# Altium PCB PA_v2.PcbDoc (part 1 of 2)
Units mm, origin at the board's own origin, x right, y up, seen from the top; angles counter-clockwise.
Board outline 179 x 79 mm, 2 copper layers (Top Layer, Bottom Layer), stack 1.571 mm thick; 155 components, 92 nets, 518 pads, 817 vias.
Unrouted connection lines stored in the file: 1.
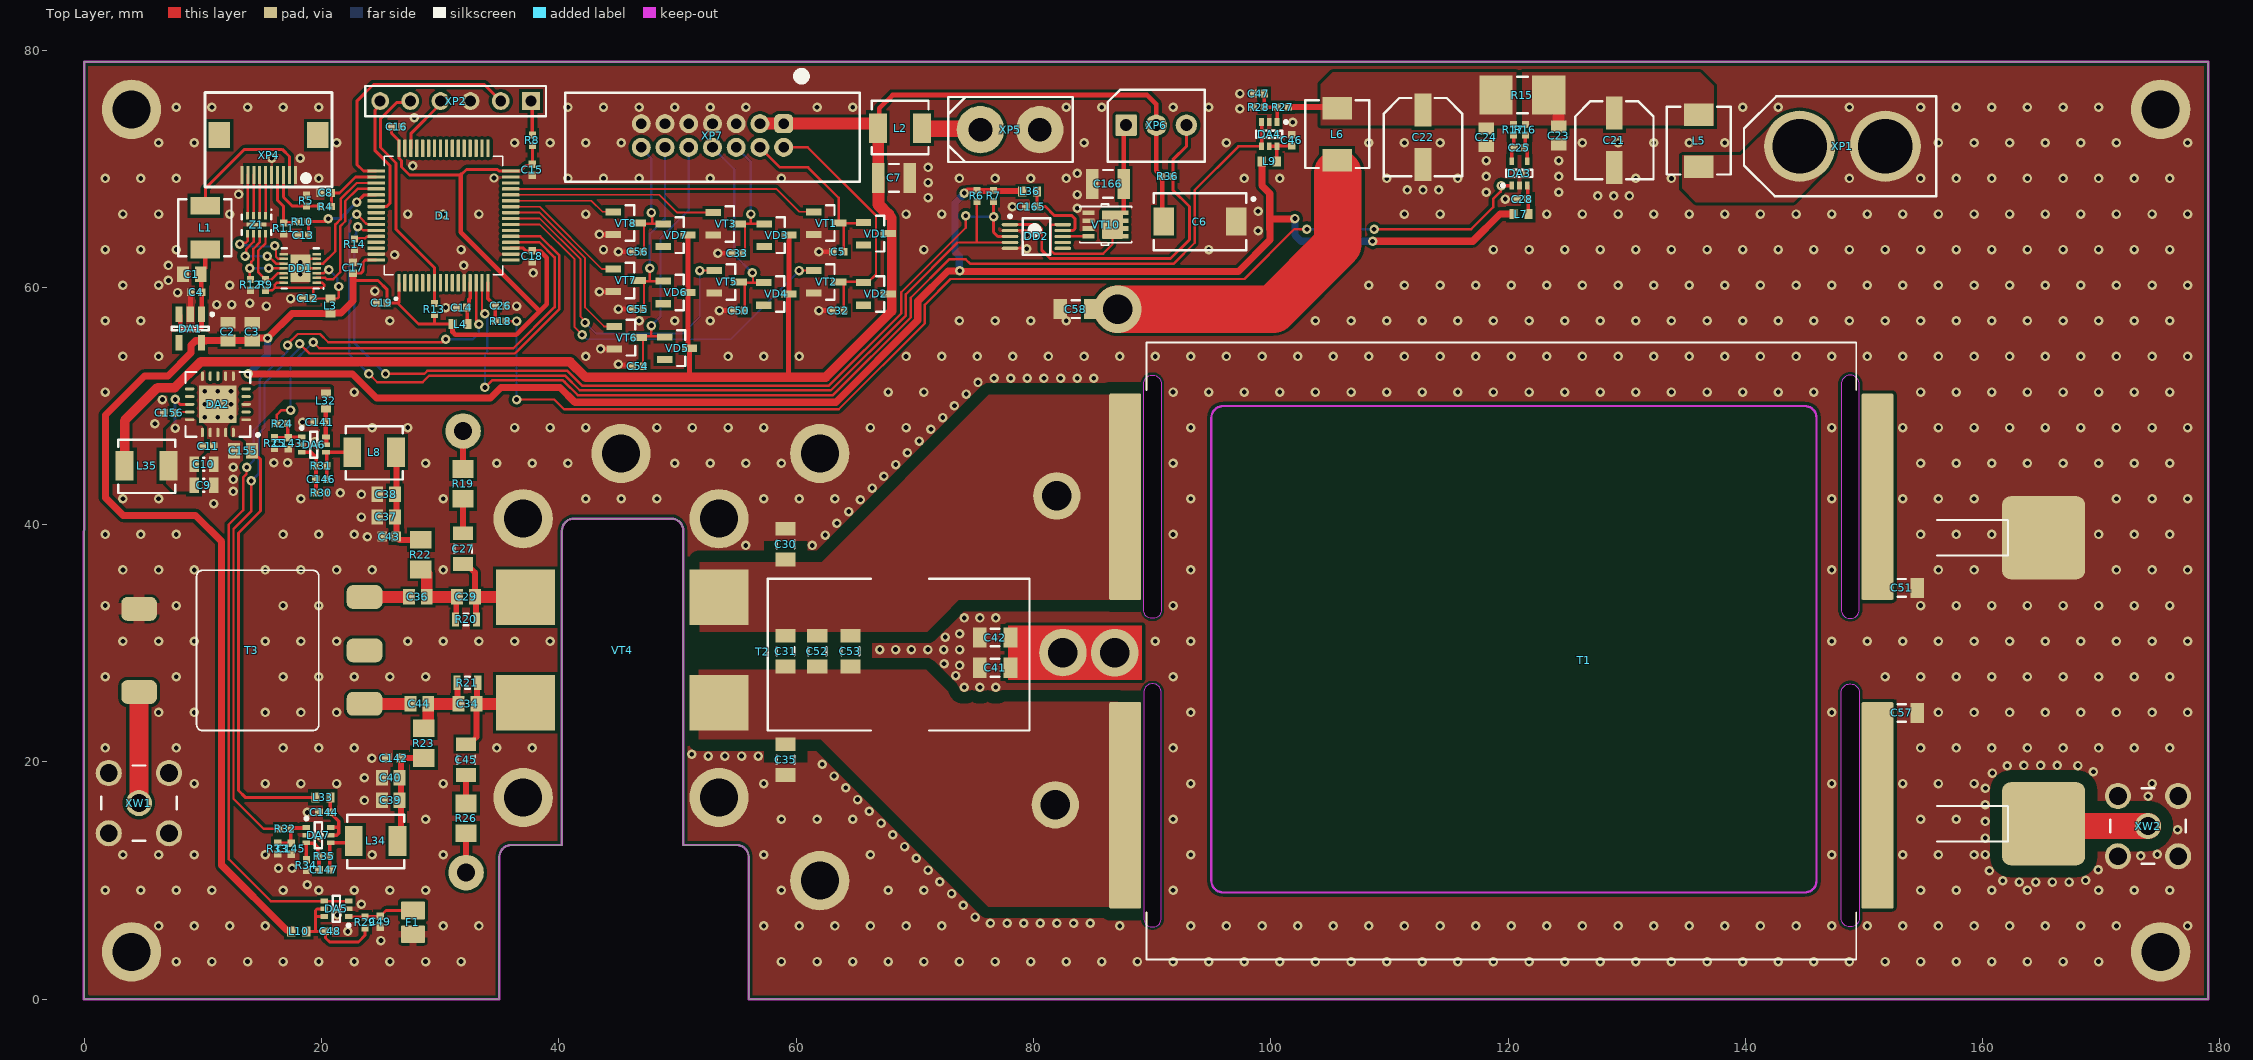
[diagram p0: Top Layer view]
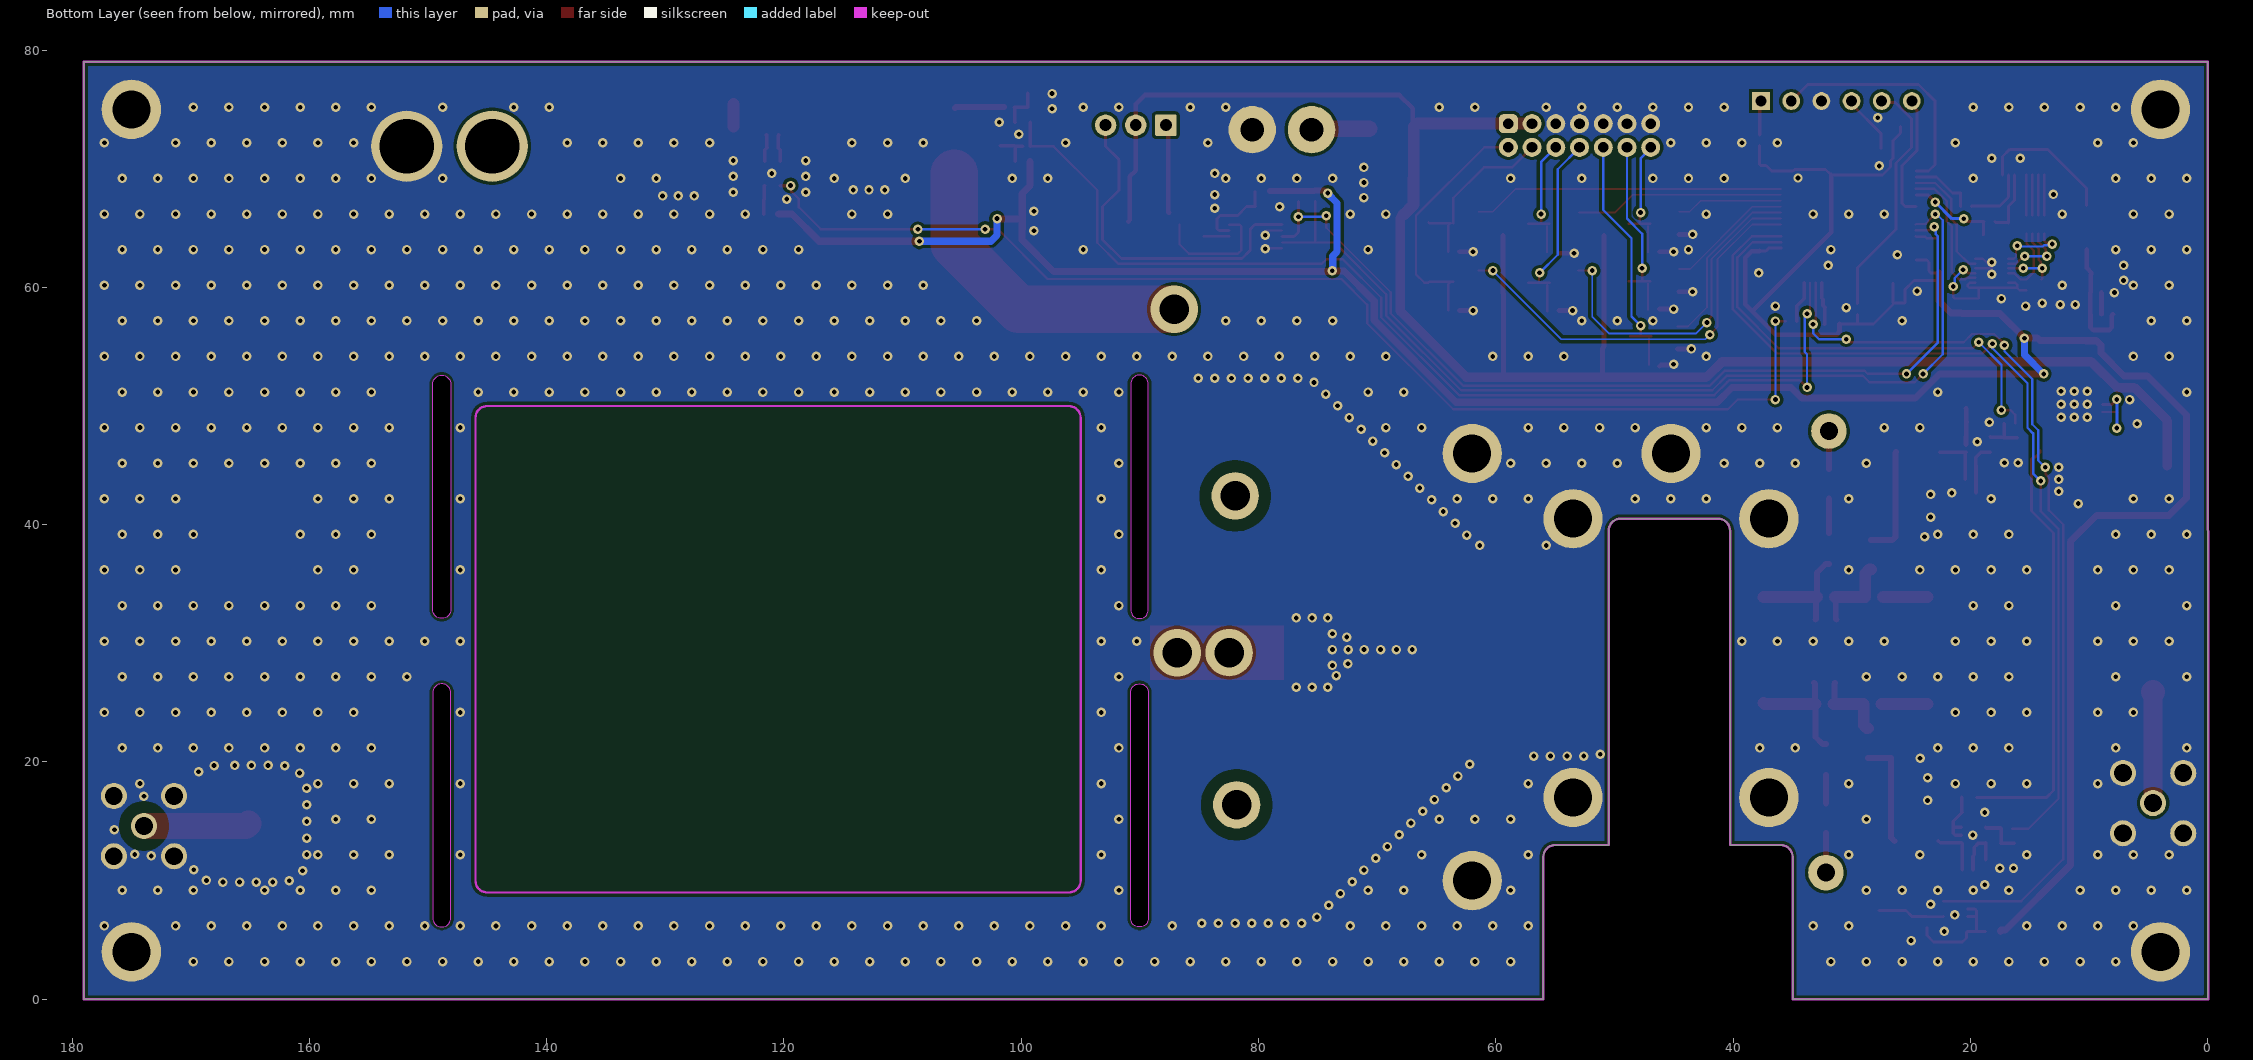
[diagram p1: Bottom Layer view, seen from below]

## Layer stack, top to bottom
Top Solder: solder mask 0.0102, Solder Resist, Dk 3.5
Top Layer: signal copper 0.0356
Dielectric 1: dielectric 1.5, FR-4, Dk 4.8
Bottom Layer: signal copper 0.0356
Bottom Solder: solder mask 0.0102, Solder Resist, Dk 3.5

## Board outline
0,0 35,0 35,12 cw(c36,12) 36,13 40.25,13 40.25,39.5 40.275,39.5 cw(c41.275,39.5) 41.275,40.5 49.53,40.5 49.53,40.513 49.558,40.484 49.5,40.5 cw(c49.5,39.5) 50.5,39.5 50.5,13 55,13 cw(c55,12) 56,12 56,0 179,0 179,79 0,79

## Design rules (kind name [scope] priority, off if disabled: settings)
Clearance Clearance_1 [InNetClass('RF CLR')] p1: gap=0.25 ignorepadtopadclearanceinfootprint=FALSE except(1: Arc-Fill Arc-Poly Arc-Region Track-Fill Track-Poly Track-Region SMDPad-Fill SMDPad-Poly SMDPad-Region THPad-Fill THPad-Poly THPad-Region Via-Fill Via-Poly Via-Region Fill-Fill Fill-Poly Fill-Region Poly-Poly Poly-Region Region-Region)
Clearance [All] p2: gap=0.2 ignorepadtopadclearanceinfootprint=FALSE except(0.25: Arc-Fill Arc-Poly Arc-Region Track-Fill Track-Poly Track-Region SMDPad-Fill SMDPad-Poly SMDPad-Region THPad-Fill THPad-Poly THPad-Region Via-Fill Via-Poly Via-Region Fill-Fill Fill-Poly Fill-Region Poly-Poly Poly-Region Region-Region)
Height [All] p1: minheight=0 maxheight=35 prefheight=12.7
HoleSize [All] p1: absolutevalues=TRUE maxlimit=5 minlimit=0.2 maxpercent=80.000 minpercent=20.000
PolygonConnect [All] p1: connectstyle=Direct reliefconductorwidth=0.254 reliefentries=4 polygonreliefangle="90 Angle" airgapwidth=0.254
RoutingVias [All] p1: holewidth=0.4 width=0.8 viastyle="Through Hole" minholewidth=0.3 minwidth=0.7 maxholewidth=4 maxwidth=5
SolderMaskExpansion [All] p1: expansion=0.102 istentingtop=FALSE
SupplyNets "Schematic Supply Nets_35" [InNet('IN_5V')] p1: voltage=0.000
SupplyNets "Schematic Supply Nets_2" [InNet('VDD_12V')] p2: voltage=0.000
SupplyNets "Schematic Supply Nets_22" [InNet('I2C_SCL')] p3: voltage=0.000
SupplyNets "Schematic Supply Nets_7" [InNet('I2C_SDA')] p4: voltage=0.000
SupplyNets "Schematic Supply Nets_31" [InNet('BAND3_EN')] p5: voltage=0.000
SupplyNets "Schematic Supply Nets_30" [InNet('BAND2_EN')] p6: voltage=0.000
SupplyNets "Schematic Supply Nets_29" [InNet('BAND6_EN')] p7: voltage=0.000
SupplyNets "Schematic Supply Nets_28" [InNet('BAND4_EN')] p8: voltage=0.000
SupplyNets "Schematic Supply Nets_25" [InNet('BAND1_EN')] p9: voltage=0.000
SupplyNets "Schematic Supply Nets_21" [InNet('BAND5_EN')] p10: voltage=0.000
SupplyNets "Schematic Supply Nets_11" [InNet('BAND0_EN')] p11: voltage=0.000
SupplyNets "Schematic Supply Nets_20" [InNet('DAC_BIAS2')] p12: voltage=0.000
SupplyNets "Schematic Supply Nets_19" [InNet('VDD_5V0')] p13: voltage=0.000
SupplyNets "Schematic Supply Nets_18" [InNet('DAC_BIAS1')] p14: voltage=0.000
SupplyNets "Schematic Supply Nets_17" [InNet('CON_RS422Z')] p15: voltage=0.000
SupplyNets "Schematic Supply Nets_16" [InNet('ADC_CURRENT')] p16: voltage=0.000
SupplyNets "Schematic Supply Nets_15" [InNet('VDD_28V')] p17: voltage=0.000
SupplyNets "Schematic Supply Nets_14" [InNet('GND')] p18: voltage=0.000
SupplyNets "Schematic Supply Nets_13" [InNet('CON_RS422A')] p19: voltage=0.000
SupplyNets "Schematic Supply Nets_12" [InNet('ADC_VOLT')] p20: voltage=0.000
SupplyNets "Schematic Supply Nets_9" [InNet('CON_TX_FAIL')] p21: voltage=0.000
SupplyNets "Schematic Supply Nets_8" [InNet('VDD_3V3')] p22: voltage=0.000
SupplyNets "Schematic Supply Nets_6" [InNet('ADC_TEMP')] p23: voltage=0.000
SupplyNets "Schematic Supply Nets_5" [InNet('CON_RS422B')] p24: voltage=0.000
SupplyNets "Schematic Supply Nets_3" [InNet('CON_TXON')] p25: voltage=0.000
SupplyNets "Schematic Supply Nets_1" [InNet('TX_FAIL')] p26: voltage=0.000
SupplyNets "Schematic Supply Nets" [InNet('CON_RS422Y')] p27: voltage=0.000
Width [All] p1: maxlimit=5 minlimit=0.125 preferedwidth=0.25
28 further rules are at their usual default settings.

## Classes and differential pairs
net class "RF CLR": NetC30_2 NetC31_1 NetT1_4
component class PA_MCU: C1 C2 C3 C4 C6 C7 C8 C9 C10 C11 C12 C13 C14 C15 C16 C17 C18 C19 C155 C156 C165 C166 D1 DA1 DA2 DD1 DD2 L1 L2 L3 L4 L35 L36 R4 R5 R6 R7 R8 R9 R10 R11 R12 R13 R14 R36 VT10 XP1 XP2 XP4 XP5 XP6 Z1
component class PA_AMP: C5 C21 C22 C23 C24 C25 C26 C27 C28 C29 C30 C31 C32 C33 C34 C35 C36 C37 C38 C39 C40 C41 C42 C43 C44 C45 C46 C47 C48 C49 C50 C52 C53 C54 C55 C56 C141 C142 C143 C144 C145 C146 C147 DA3 DA4 DA5 DA6 DA7 F1 L5 L6 L7 L8 L9 L10 L32 L33 L34 R15 R16 R17 R18 R19 R20 R21 R22 R23 R24 R25 R26 R27 R28 R29 R30 R31 R32 R33 R34 R35 T1 T2 T3 VD1 VD2 VD3 VD4 VD5 VD6 VD7 VT1 VT2 VT3 VT4 VT5 VT6 VT7 VT8 XP7 XW1 XW2

## Components (designator, comment, footprint, x,y, rotation, side; value= is the part's Value field where it differs from the comment)
C1 "22мк" CAPC2012X12L 9.076,61.095 r0 top
C2 "22мк" CAPC2012X12L 12.124,56.269 r270 top
C3 "22мк" CAPC2012X12L 14.156,56.269 r270 top
C4 "1мк" CAPC1005X06N 9.457,59.571 r0 top
C5 "0.01мк" CAPC1005X06N 63.559,63 r0 top
C6 "22мк" CAPMP7343X28L 94.041,65.54 r0 top
C7 "10мк" CAPC3225X27L 68.258,69.223 r180 top
C8 "0.01мк" CAPC1005X06N 20.379,67.953 r0 top
C9 "CC0805KKX5R8BB106" CAPC2012X09L 10.092,43.315 r180 top value="0805 10 мкФ 25В X7R"
C10 "CC0805KKX5R8BB106" CAPC2012X09L 10.092,45.093 r180 top value="0805 10 мкФ 25В X7R"
C11 "0.1мк" CAPC1005X06N 10.473,46.617 r180 top
C12 "1мк" CAPC1005X06N 18.855,59.063 r0 top
C13 "0.01мк" CAPC1005X06N 18.474,64.397 r0 top
C14 "0.1мк" CAPC1005X06N 31.809,58.301 r0 top
C15 "0.1мк" CAPC1005X06N 37.778,69.906 r90 top
C16 "0.1мк" CAPC1005X06N 26.348,73.541 r180 top
C17 "0.1мк" CAPC1005X06N 22.665,61.651 r270 top
C18 "0.1мк" CAPC1005X06N 37.778,62.619 r90 top
C19 "0.1мк" CAPC1005X06N 25.078,58.682 r0 top
C21 "33мк" CAPAE7664X77L 128.964,72.398 r270 top
C22 "33мк" CAPAE7664X77L 112.835,72.652 r270 top
C23 "1000" CAPC2012X12L 124.265,72.791 r90 top
C24 "1000" CAPC2012X12L 118.169,72.652 r90 top
C25 "0.01мк" CAPC1005X06N 120.963,71.763 r0 top
C26 "0.1мк" CAPC1005X06N 35.111,58.428 r180 top
C27 "1000" CAPC3216X19L 31.936,37.981 r270 top
C28 "0.1мк" CAPC1005X06N 121.217,67.445 r0 top
C29 "1000" CAPC2012X12L 32.19,33.917 r180 top
C30 "220" CAPC3216X19L 59.114,38.362 r270 top
C31 "150" CAPC3216X19L 59.114,29.345 r90 top
C32 "0.01мк" CAPC1005X06N 63.559,58.047 r0 top
C33 "0.01мк" CAPC1005X06N 55.05,62.873 r0 top
C34 "1000" CAPC2012X12L 32.317,24.9 r180 top
C35 "220" CAPC3216X19L 59.114,20.201 r90 top
C36 "0,01мк" CAPC2012X12L 28.126,33.917 r180 top
C37 "0,01мк" CAPC2012X12L 25.459,40.648 r0 top
C38 "1000" CAPC2012X12L 25.459,42.553 r0 top
C39 "1000" CAPC2012X12L 25.84,16.772 r0 top
C40 "0,01мк" CAPC2012X12L 25.84,18.677 r0 top
C41 "1000" CAPC3216X19L 76.767,27.948 r0 top
C42 "2,2мк" CAPC3216X19L 76.767,30.488 r0 top
C43 "0.1мк" CAPC1608X08L 25.713,38.997 r0 top
C44 "0,01мк" CAPC2012X12L 28.253,24.9 r180 top
C45 "1000" CAPC3216X19L 32.19,20.201 r90 top
C46 "0.1мк" CAPC1005X06N 101.786,72.398 r90 top
C47 "100" CAPC1005X06N 98.992,76.335 r180 top
C48 "0.1мк" CAPC1005X06N 20.76,5.723 r0 top
C49 "1000" CAPC1005X06N 24.951,6.533 r270 top
C50 "0.01мк" CAPC1005X06N 55.177,58.047 r0 top
C51 "2,2мк" CAPC3216X19L 153.192,34.671 r180 top (schematic designator C42)
C52 "100" CAPC3216X19L 61.781,29.345 r90 top
C53 "100" CAPC3216X19L 64.575,29.345 r90 top
C54 "0.01мк" CAPC1005X06N 46.668,53.348 r0 top
C55 "0.01мк" CAPC1005X06N 46.668,58.174 r0 top
C56 "0.01мк" CAPC1005X06N 46.668,63 r0 top
C57 "2,2мк" CAPC3216X19L 153.192,24.13 r180 top (schematic designator C42)
C58 "2,2мк" CAPC3216X19L 83.561,58.166 r0 top (schematic designator C42)
C141 "0.1мк" CAPC1005X06N 19.871,48.649 r0 top
C142 "0.1мк" CAPC1608X08L 26.094,20.328 r0 top
C143 "1000" CAPC1005X06N 17.204,46.871 r90 top
C144 "0.1мк" CAPC1005X06N 20.252,15.756 r0 top
C145 "1000" CAPC1005X06N 17.458,12.708 r90 top
C146 "1000" CAPC1005X06N 19.998,43.823 r180 top
C147 "1000" CAPC1005X06N 20.252,10.93 r180 top
C155 "47мк" CAPC2012X12L 13.394,46.236 r0 top
C156 "1мк" CAPC1005X06N 7.171,49.411 r0 top
C165 "0.1мк" CAPC1005X06N 79.815,66.81 r0 top
C166 "10мк" CAPC3225X27L 86.292,68.715 r0 top
D1 "STM32F103RCT6" QFP50P1200X1200X160-64N 30.285,66.048 r90 top
DA1 "LP5907MFX-3.3" SOT23-5AM 8.949,56.523 r270 top
DA2 "TPS7A4700" QFN65P500X500X100_HS-21L 11.273,50.143 r180 top
DA3 "INA280A3IDCKR" SOT65P210X110-5L 120.963,69.604 r90 top
DA4 "MAX4231AXT-T" TSOP65P210X100-6L 99.881,72.906 r270 top
DA5 "MAX4231AXT-T" TSOP65P210X100-6L 21.268,7.628 r180 top
DA6 "MAX4231AXT-T" TSOP65P210X100-6L 19.363,46.744 r0 top
DA7 "MAX4231AXT-T" TSOP65P210X100-6L 19.753,13.836 r0 top
DD1 "MAX13433EETD+" SON40P300X80_HS-15L 18.22,61.603 r180 top
DD2 "MAX6650EUB" TSSOP50P490X110-10N 80.257,64.286 r0 top
F1 "NTCALUG01" NTCALUG01T 49.589,6.485 r0 top
L1 "2,2мкГн" CSAB0420 10.219,65.032 r270 top
L2 "2,2мкГн" CSAB0420 68.766,73.414 r180 top
L3 "BLM18PG121SN1D" INDC1608X08L 20.76,58.428 r90 top
L4 "BLM18PG121SN1D" INDC1608X08L 31.682,56.904 r180 top
L5 "0,22мкГн" CSAB0530 136.076,72.357 r90 top
L6 "0,22мкГн" CSAB0530 105.596,72.906 r270 top
L7 "BLM18PG121SN1D" INDC1608X08L 121.09,66.175 r0 top
L8 "2,2мкГн" CSAB0420 24.443,46.109 r0 top
L9 "BLM18PG121SN1D" INDC1608X08L 99.881,70.62 r0 top
L10 "BLM18PG121SN1D" INDC1608X08L 18.093,5.723 r0 top
L32 "BLM18PG121SN1D" INDC1608X08L 20.379,50.427 r270 top
L33 "BLM18PG121SN1D" INDC1608X08L 20.125,17.026 r0 top
L34 "2,2мкГн" CSAB0420 24.57,13.343 r0 top
L35 "2,2мкГн" CSAB0420 5.266,44.966 r0 top
L36 "BLM18PG121SN1D" INDC1608X08L 79.688,68.08 r0 top
R4 "100" RESC1005X06N 20.379,66.81 r0 top
R5 "10к" RESC1005X06N 18.728,67.318 r90 top
R6 "4.7к" RESC1005X06N 75.243,67.699 r90 top
R7 "4.7к" RESC1005X06N 76.64,67.699 r90 top
R8 "100" RESC1005X06N 37.778,72.398 r90 top
R9 "180к" RESC1005X06N 15.299,60.206 r270 top
R10 "100" RESC1005X06N 18.405,65.54 r0 top
R11 "10к" RESC1005X06N 16.823,64.963 r270 top
R12 "180к" RESC1005X06N 14.029,60.206 r90 top
R13 "10к" RESC1005X06N 29.523,58.174 r270 top
R14 "100" RESC1005X06N 22.792,63.635 r270 top
R15 "0.003" RESC6332X04N 121.217,76.208 r180 top
R16 "10" RESC1005X06N 121.471,73.287 r270 top
R17 "10" RESC1005X06N 120.455,73.287 r270 top
R18 "100" RESC1005X06N 35.111,57.158 r0 top
R19 "33" RESC3216X04L 31.936,43.442 r90 top
R20 "18" RESC2012X05L 32.19,32.012 r0 top
R21 "18" RESC2012X05L 32.303,26.678 r0 top
R22 "33" RESC3216X04L 28.38,37.473 r90 top
R23 "33" RESC3216X04L 28.634,21.598 r270 top
R24 "100" RESC1005X06N 16.696,48.522 r0 top
R25 "10к" RESC1005X06N 16.061,46.871 r270 top
R26 "33" RESC3216X04L 32.19,15.248 r270 top
R27 "91к" RESC1005X06N 101.024,75.192 r0 top
R28 "10к" RESC1005X06N 98.992,75.192 r0 top
R29 "10к" RESC1005X06N 23.681,6.485 r90 top
R30 "10к" RESC1005X06N 19.998,42.68 r180 top
R31 "10к" RESC1005X06N 19.998,44.966 r0 top
R32 "100" RESC1005X06N 16.95,14.359 r0 top
R33 "10к" RESC1005X06N 16.315,12.708 r270 top
R34 "10к" RESC1005X06N 18.728,11.311 r90 top
R35 "10к" RESC1005X06N 20.252,12.073 r0 top
R36 "10к" RESC1005X06N 91.303,69.35 r180 top
T1 "Трансформатор PUM_IN" TRANSFORMER_KV_PAOUT_400W 119.439,29.345 r0 top
T2 "Трансформатор PUM_IN" TRSF_VOLT 81.778,29.073 r180 top
T3 "Трансформатор PUM_IN" Transformer_KV_PAIN 14.631,29.401 r0 top
VD1 "BAS16" SOT23_N 66.734,64.524 r0 top
VD2 "BAS16" SOT23_N 66.734,59.444 r0 top
VD3 "BAS16" SOT23_N 58.352,64.397 r0 top
VD4 "BAS16" SOT23_N 58.318,59.444 r0 top
VD5 "BAS16" SOT23_N 49.97,54.872 r0 top
VD6 "BAS16" SOT23_N 49.843,59.571 r0 top
VD7 "BAS16" SOT23_N 49.843,64.397 r0 top
VT1 "PDTC114ET" SOT23_N 62.543,65.413 r0 top
VT2 "PDTC114ET" SOT23_N 62.543,60.46 r0 top
VT3 "PDTC114ET" SOT23_N 54.068,65.347 r0 top
VT4 "MRFE6VP6600N" OM-780-4L 45.375,29.434 r0 top
VT5 "PDTC114ET" SOT23_N 54.161,60.46 r0 top
VT6 "PDTC114ET" SOT23_N 45.745,55.761 r0 top
VT7 "PDTC114ET" SOT23_N 45.652,60.587 r0 top
VT8 "PDTC114ET" SOT23_N 45.652,65.413 r0 top
VT10 "SiSS10DN" PowerPAK_1212-8W 86.203,65.266 r0 top
XP1 "XT60-F" XT60-F 148.185,71.89 r0 top
XP2 "PLS-6" HDR1X6 37.651,75.7 r180 top
XP4 "FH12-10S-0.5SVA" FH12-10S-0.5SH 15.549,69.477 r180 top
XP5 "XT30UPB-M" XT30UPB-M 78.037,73.287 r0 top
XP6 "22232031" 22232031 90.356,73.668 r180 top
XP7 "IDC2-14MS" IDC2-14MS 58.955,73.795 r270 top
XW1 "SMA-JR" SMA-JR 4.618,16.531 r270 top
XW2 "SMA-JR" SMA-JR 173.935,14.6 r90 top
Z1 "EClamp2394P" SON50P160X65_HS-9N 14.537,65.286 r270 top

## Footprints (in the part's own frame and the unit in brackets; to place one, negate y for a bottom-side part, rotate by r counter-clockwise, add the part's x,y. Pads: shape width x height; smd on the part's side, far side on the other; paste and mask are expansions set on the pad)
22232031 [mm]
  rrect10% 1.8x1.8 hole 1 mask+0.05: 1(2.54,0)
  round 1.8 hole 1 mask+0.05: 2(0,0) 3(-2.54,0)
  silkscreen extent -4.08,-3 4.1,3.08, body extent -3.81,-2.9 3.81,2.9, height 11.72
CAPAE7664X77L [mm] "Aluminum Electrolytic Capacitor, Body 6,35x6,35x7,70mm, IPC High Density"
  rect 2.8x1.4 smd: 1(-2.3,0) 2(2.3,0)
  silkscreen extent -3.3,-3.3 3.3,3.3, body extent -3.5,-3.3 3.5,3.3, height 7.71
CAPC1005X06N [mm] "Chip Capacitor, 2-Leads, Body 1,00x0,50mm, IPC Medium Density"
  rect 0.64x0.64 smd mask+0.05: 1(-0.46,0) 2(0.46,0)
  body extent -0.55,-0.3 0.55,0.3, height 0.6
CAPC1608X08L [mm] "Chip Capacitor, 2-Leads, Body 1,60x0,80mm, IPC High Density"
  rect 0.8x0.85 smd mask+0.08: 1(-0.6,0) 2(0.6,0)
  body extent -0.85,-0.45 0.85,0.45, height 0.8
CAPC2012X09L [mm] "Chip Capacitor, 2-Leads, Body 2,00x1,25mm, IPC High Density"
  rect 0.8x1.3 smd: 1(-0.825,0) 2(0.825,0)
  silkscreen extent -0.05,-0.55 0.05,0.55, body extent -1,-0.63 1,0.63, height 0.9
CAPC2012X12L [mm] "Chip Capacitor, 2-Leads, Body 2,00x1,25mm, IPC High Density"
  rect 1x1.3 smd mask+0.05: 1(-0.75,0) 2(0.75,0)
  body extent -1.05,-0.67 1.05,0.67, height 1.25
CAPC3216X19L [mm] "Chip Capacitor, 2-Leads, Body 3,20x1,60mm, IPC High Density"
  rect 1.15x1.7 smd: 1(-1.3,0) 2(1.3,0)
  silkscreen extent -0.35,-0.75 0.35,0.75, body extent -1.68,-0.87 1.68,0.87, height 1.9
CAPC3225X27L [mm] "Chip Capacitor, 2-Leads, Body 3,20x2,50mm, IPC High Density"
  rect 1.05x2.55 smd: 1(-1.325,0) 2(1.325,0)
  silkscreen extent -0.4,-1.17 0.4,1.18, body extent -1.6,-1.25 1.6,1.25, height 2.7
CAPMP7343X28L [mm] "Molded Capacitor, 2-Leads, Body 7.30x4.30mm, IPC High Density"
  rect 1.7x2.35 smd: 1(3.05,0) 2(-3.05,0)
  silkscreen extent -3.9,-2.4 4.63,2.4, body extent -3.8,-2.3 3.8,2.3, height 3.1
CSAB0420 [mm] "Wire Wound Inductor, 2-Leads,"
  rect 1.5x2.5 smd: 1(-1.85,0) 2(1.85,0)
  silkscreen extent -2.4,-2.3 2.4,2.2, body extent -2.35,-2.1 2.35,2.1, height 1.85
CSAB0530 [mm] "Precision Wire Wound Inductor, 2-Leads, Body 5,40x5,20mm, IPC Medium Density"
  rect 1.9x2.5 smd: 1(-2.2,0) 2(2.2,0)
  silkscreen extent -2.85,-2.7 2.85,2.7, body extent -2.73,-2.59 2.72,2.56, height 2.89
FH12-10S-0.5SH [mm] "FFC/FPC Connector 10 Circuits"
  rect 1.8x2.2 smd mask+0.051: 0(-4.15,-3.35) 0(4.15,-3.35)
  rect 0.25x1.5 smd mask+0.051: 1(-2.25,0) 2(-1.75,0) 3(-1.25,0) 4(-0.75,0) 5(-0.25,0) 6(0.25,0) 7(0.75,0) 8(1.25,0) 9(1.75,0) 10(2.25,0)
  silkscreen extent -5.35,-6.95 5.35,1.02, body extent -4.55,-6.35 4.55,0.05, height 2.14
HDR1X6 [mm]
  rect 1.5x1.5 hole 0.92: 1(0,0)
  round 1.5 hole 0.92: 2(2.54,0) 3(5.08,0) 4(7.62,0) 5(10.16,0) 6(12.7,0)
  silkscreen extent -1.27,-1.27 13.97,1.27, body extent -1.25,-1.22 13.89,1.28, height 8.2
IDC2-14MS [mm]
  rrect50% 1.6x1.6 hole 0.9: 1(0,0)
  round 1.6 hole 0.9: 2(2,0) 3(0,-2) 4(2,-2) 5(0,-4) 6(2,-4) 7(0,-6) 8(2,-6) 9(0,-8) 10(2,-8) 11(0,-10) 12(2,-10) 13(0,-12) 14(2,-12)
  silkscreen extent -4.2,-18.4 4.9,6.4, body extent -2.2,-17.98 4.51,5.98, height 5
INDC1608X08L [mm] "Chip Inductor, 2-Leads, Body 1,60x0,80mm, IPC High Density"
  rect 0.69x0.84 smd: 1(-0.63,0) 2(0.63,0)
  body extent -0.8,-0.4 0.8,0.4, height 0.95
NTCALUG01T [mm] "CNTC Thermistors, 2-Leads, Body 15,7x7,2mm"
  rrect10% 2x1.5 smd: 1(-21.875,1) 2(-21.875,-1)
  body extent -12.1,-3.6 3.6,3.6, height 5.6
OM-780-4L [mm] "20.7x10.4"
  rect 5x4.7 smd: 1(8.125,4.45) 2(8.125,-4.45) 3(-8.175,4.45) 4(-8.175,-4.45)
  body extent -6.05,-10.25 6.05,10.25, height 2.15
PowerPAK_1212-8W [mm]
  rrect10% 1.8x2.4 smd mask+0.05: D(0.47,0.02)
  rrect10% 1x0.4 smd mask+0.05: D(1.33,-0.97) D(1.33,-0.31) D(1.33,0.35) D(1.33,1.01) G(-1.57,-0.97) S(-1.57,0.35) S(-1.57,1.01) S(-1.57,-0.31)
  silkscreen extent -2.29,-1.71 2.08,1.75, body extent -1.65,-1.53 1.65,1.53, height 1.04
QFN65P500X500X100_HS-21L [mm] "QFN, 20-Leads, Body 5,00x5,00mm, Pitch 0,65mm, Thermal Pad 3,15x3,15mm, IPC High Density"
  oval 0.8x0.25 smd mask+0.07: 1(-2.375,1.3) 2(-2.375,0.65) 3(-2.375,0) 4(-2.375,-0.65) 5(-2.375,-1.3) 11(2.375,-1.3) 12(2.375,-0.65) 13(2.375,0) 14(2.375,0.65) 15(2.375,1.3)
  oval 0.25x0.8 smd mask+0.07: 6(-1.3,-2.375) 7(-0.65,-2.375) 8(0,-2.375) 9(0.65,-2.375) 10(1.3,-2.375) 16(1.3,2.375) 17(0.65,2.375) 18(0,2.375) 19(-0.65,2.375) 20(-1.3,2.375)
  rect 3.15x3.15 smd mask+0.07: 21(0,0)
  silkscreen extent -3.5,-2.73 2.73,2.72, body extent -2.66,-2.66 2.66,2.66, height 1
QFP50P1200X1200X160-64N [mm]
  rrect50% 1.49x0.28 smd: 1(-5.67,3.75) 2(-5.67,3.25) 3(-5.67,2.75) 4(-5.67,2.25) 5(-5.67,1.75) 6(-5.67,1.25) 7(-5.67,0.75) 8(-5.67,0.25) 9(-5.67,-0.25) 10(-5.67,-0.75) 11(-5.67,-1.25) 12(-5.67,-1.75) 13(-5.67,-2.25) 14(-5.67,-2.75) 15(-5.67,-3.25) 16(-5.67,-3.75) 33(5.67,-3.75) 34(5.67,-3.25) 35(5.67,-2.75) 36(5.67,-2.25) 37(5.67,-1.75) 38(5.67,-1.25) 39(5.67,-0.75) 40(5.67,-0.25) 41(5.67,0.25) 42(5.67,0.75) 43(5.67,1.25) 44(5.67,1.75) 45(5.67,2.25) 46(5.67,2.75) 47(5.67,3.25) 48(5.67,3.75)
  rrect50% 0.28x1.49 smd: 17(-3.75,-5.67) 18(-3.25,-5.67) 19(-2.75,-5.67) 20(-2.25,-5.67) 21(-1.75,-5.67) 22(-1.25,-5.67) 23(-0.75,-5.67) 24(-0.25,-5.67) 25(0.25,-5.67) 26(0.75,-5.67) 27(1.25,-5.67) 28(1.75,-5.67) 29(2.25,-5.67) 30(2.75,-5.67) 31(3.25,-5.67) 32(3.75,-5.67) 49(3.75,5.67) 50(3.25,5.67) 51(2.75,5.67) 52(2.25,5.67) 53(1.75,5.67) 54(1.25,5.67) 55(0.75,5.67) 56(0.25,5.67) 57(-0.25,5.67) 58(-0.75,5.67) 59(-1.25,5.67) 60(-1.75,5.67) 61(-2.25,5.67) 62(-2.75,5.67) 63(-3.25,5.67) 64(-3.75,5.67)
  silkscreen extent -7.1,-5 5,5, body extent -6,-6 6,6, height 0.72
RESC1005X06N [mm] "Chip Resistor, 2-Leads, Body 1,00x0,50mm, IPC Medium Density"
  rect 0.6x0.6 smd mask+0.05: 1(-0.45,0) 2(0.45,0)
  body extent -0.55,-0.3 0.55,0.3, height 0.6
RESC2012X05L [mm] "Chip Resistor, 2-Leads, Body 2,00x1,25mm, IPC High Density"
  rect 0.6x1.2 smd mask+0.05: 1(-0.875,0) 2(0.875,0)
  silkscreen extent -0.2,-0.5 0.2,0.5, body extent -1,-0.63 1,0.63, height 0.5
RESC3216X04L [mm] "Chip Resistor, 2-Leads, Body 3,20x1,60mm, IPC High Density"
  rect 1.5x1.8 smd: 1(-1.25,0) 2(1.25,0)
  body extent -1.68,-0.87 1.68,0.87, height 0.44
RESC6332X04N [mm] "Chip Resistor, 2-Leads, Body 6,32x3,20mm, IPC Medium Density"
  rect 2.8x3.25 smd: 1(-2.225,0) 2(2.225,0)
  silkscreen extent -0.45,-1.52 0.45,1.53, body extent -3.27,-1.6 3.27,1.6, height 0.4
SMA-JR [mm] "Connector; RF Coaxial, SMA, SM; 5 Position; Vertical - Large Pad Version"
  round 2.2 hole 1.5: 1(0,0) 2(-2.54,2.54) 2(-2.54,-2.54) 2(2.54,2.54) 2(2.54,-2.54)
  silkscreen extent -3.17,-3.17 3.17,3.17, body extent -3.5,-11.6 3.5,3.5, height 10.16
SON40P300X80_HS-15L [mm] "SON, 14-Leads, Body 3.00x3.00mm, Pitch 0.40mm, Thermal Pad 2.30x1.69mm, IPC High Density"
  rect 0.7x0.2 smd mask+0.075: 1(-1.395,1.2) 2(-1.395,0.8) 3(-1.395,0.4) 4(-1.395,0) 5(-1.395,-0.4) 6(-1.395,-0.8) 7(-1.395,-1.2) 8(1.395,-1.2) 9(1.395,-0.8) 10(1.395,-0.4) 11(1.395,0) 12(1.395,0.4) 13(1.395,0.8) 14(1.395,1.2)
  rect 1.69x2.3 smd mask+0.075: 15(0,0)
  silkscreen extent -2,-1.7 1.55,1.75, body extent -1.5,-1.5 1.5,1.5, height 0.73
SON50P160X65_HS-9N [mm] "SON, 8-Leads, Body 2,10x1,60mm, Pitch 0,50mm, Thermal Pad 1,68x0,33mm, IPC Medium Density"
  rect 0.63x0.25 smd mask+0.05: 1(-0.765,0.75) 2(-0.765,0.25) 3(-0.765,-0.25) 4(-0.765,-0.75) 5(0.765,-0.75) 6(0.765,-0.25) 7(0.765,0.25) 8(0.765,0.75)
  rect 0.33x1.68 smd mask+0.05: 9(0,0)
  silkscreen extent -1.3,-1.25 0.85,1.3, body extent -0.85,-1.1 0.85,1.1, height 0.65
SOT23-5AM [mm] "SOT23, 5-Leads, Body 2.9x1.7mm, Pitch 0.95mm, Lead Span 2.8mm, IPC Low Density"
  rect 1.3x0.6 smd: 1(-1.2,0.95) 2(-1.2,0) 3(-1.2,-0.95) 4(1.2,-0.95) 5(1.2,0.95)
  silkscreen extent -1.32,-1.55 0.15,1.98, body extent -1.5,-1.5 1.5,1.5, height 1.3
SOT23_N [mm] "SOT23, 3-Leads, Body 2.9x1.3mm, Pitch 0.95mm, Lead Span 2.3mm, IPC Medium Density"
  rect 1.3x0.6 smd: 1(-1.05,0.95) 2(-1.05,-0.95) 3(1.05,0)
  silkscreen extent 0,-1.5 0.7,1.5, body extent -1.25,-1.46 1.23,1.46, height 1
SOT65P210X110-5L [mm] "SOT23, 5-Leads, Body 2,00x2,10mm, Pitch 0,65mm, IPC High Density"
  rect 0.65x0.4 smd: 1(-1.025,0.65) 2(-1.025,0) 3(-1.025,-0.65) 4(1.025,-0.65) 5(1.025,0.65)
  silkscreen extent -1.15,-1.1 0.3,1.52, body extent -1.2,-1.07 1.2,1.07, height 1.1
Transformer_KV_PAIN [mm] "BN-43-302, 10,3x13,3x7,5 mm, hole d 3,8 mm"
  rrect50% 3x2 smd: 1(9,4.5) 2(9,0) 3(9,-4.5) 4(-10,-3.5) 5(-10,3.5)
  silkscreen extent -5.15,-6.75 5.15,6.75, body extent -10.15,-6.65 10.16,6.65, height 7.5
TRANSFORMER_KV_PAOUT_400W [mm] "FB-61-1020 OR 2661102002, 28.6x26 mm, ID 12.7 mm"
  rrect10% 2.7x17.4 smd: 1(-31.7,13) 2(31.7,-13) 2(31.7,13) 3(-31.7,-13)
  rrect20% 7x7 smd: 4(45.7,-14.55) 5(45.7,9.55)
  Keep-Out Layer board cut-out: -30.15,-22.5 -30.076,-22.825 -29.868,-23.086 -29.567,-23.231 -29.233,-23.231 -28.932,-23.086 -28.724,-22.825 -28.65,-22.5 -28.65,-22.5 -28.65,-3.5 -28.724,-3.175 -28.932,-2.914 -29.233,-2.769 -29.567,-2.769 -29.868,-2.914 -30.076,-3.175 -30.15,-3.5 -30.15,-3.5
  Keep-Out Layer board cut-out: -30.15,22.5 -30.076,22.825 -29.868,23.086 -29.567,23.231 -29.233,23.231 -28.932,23.086 -28.724,22.825 -28.65,22.5 -28.65,22.5 -28.65,3.5 -28.724,3.175 -28.932,2.914 -29.233,2.769 -29.567,2.769 -29.868,2.914 -30.076,3.175 -30.15,3.5 -30.15,3.5
  Keep-Out Layer board cut-out: 30.15,22.5 30.076,22.825 29.868,23.086 29.567,23.231 29.233,23.231 28.932,23.086 28.724,22.825 28.65,22.5 28.65,22.5 28.65,3.5 28.724,3.175 28.932,2.914 29.233,2.769 29.567,2.769 29.868,2.914 30.076,3.175 30.15,3.5 30.15,3.5
  Keep-Out Layer board cut-out: 30.15,-22.5 30.076,-22.825 29.868,-23.086 29.567,-23.231 29.233,-23.231 28.932,-23.086 28.724,-22.825 28.65,-22.5 28.65,-22.5 28.65,-3.5 28.724,-3.175 28.932,-2.914 29.233,-2.769 29.567,-2.769 29.868,-2.914 30.076,-3.175 30.15,-3.5 30.15,-3.5
  silkscreen extent -29.9,-26 42.7,26, body extent -32.6,-26 45,26, height 27.4
TRSF_VOLT [mm]
  round 4 hole 2.5: 1(-0.196,-13.353) 2(-0.704,-0.145) 3(-0.069,12.682)
  round 3 hole 1.5: 4(49.842,-18.814) 5(49.588,18.397)
  silkscreen extent 2.1,-6.38 24.18,6.43, body extent 2.51,-5.96 23.49,5.96, height 24
TSOP65P210X100-6L [mm] "TSOP, 6-Leads, Body 2,00x1,25mm, Pitch 0,65mm, IPC High Density"
  rect 0.65x0.4 smd: 1(-1.025,0.65) 2(-1.025,0) 3(-1.025,-0.65) 4(1.025,-0.65) 5(1.025,0) 6(1.025,0.65)
  silkscreen extent -1.15,-1.1 0.3,1.53, body extent -1.05,-1 1.05,1, height 0.92
TSSOP50P490X110-10N [mm] "TSSOP, 10-Leads, Body 3,00x3,00mm, Pitch 0,50mm, IPC Medium Density"
  oval 1.4x0.28 smd mask+0.075: 1(-2.225,1) 2(-2.225,0.5) 3(-2.225,0) 4(-2.225,-0.5) 5(-2.225,-1) 6(2.225,-1) 7(2.225,-0.5) 8(2.225,0) 9(2.225,0.5) 10(2.225,1)
  silkscreen extent -2.35,-1.52 1.15,1.82, body extent -2.45,-1.55 2.45,1.55, height 1.1
XT30UPB-M [mm]
  round 4 hole 2: 1(-2.5,0) 2(2.5,0)
  silkscreen extent -5.23,-2.73 5.28,2.75, body extent -5.07,-2.6 5.13,2.6, height 9.4
XT60-F [mm]
  round 6 hole 4.6: 1(-3.6,0) 2(3.6,0)
  silkscreen extent -8.29,-4.2 7.91,4.2, body extent -8.16,-4.09 7.74,4.06, height 17.1

## Part data
C1 C2 C3: library part "Кер.ЧИП конд. 0805 22мкФ X5R 10% 16В", "Кер. ЧИП-конденсатор", Manufacturer=TDK, ManufacturerPartNumber=C2012X5R1C226KT, Power/Voltage=16В, Tolerance=±10%, TKE=X5R
C4 C12 C156: library part "Кер.ЧИП конд. 0402 1мкФ X5R 10%, 10В", "Кер. ЧИП-конденсатор", Power/Voltage=10В, Tolerance=±10%, PackageReference=0402, TKE=X5R
C5 C8 C13 C25 C32 C33 C50 C54 C55 C56: library part "Кер.ЧИП конд. 0402 0.01мкФ X7R 10%, 50В", "Кер. ЧИП-конденсатор", Power/Voltage=50В, Tolerance=±20%, TKE=X7R
C6: library part "Конденсатор танталовый SMD D case 22мкФ ±20% 35B", "Тант. ЧИП-конденсатор", Power/Voltage=35В, Tolerance=±20%, LatestRevisionDate=29-May-2009, LatestRevisionNote="IPC-7351 Footprint Added.", PackageDescription="Chip Capacitor", PackageReference="тип D", Published=8-Jun-2000, Publisher="Altium Limited"
C7 C166: library part "Кер.ЧИП конд. 1210 10мкФ X5R 20% 50В", "Кер. ЧИП-конденсатор", Manufacturer=Murata, ManufacturerPartNumber=GRM32ER71H106, Power/Voltage=50В, Tolerance=±20%, TKE=X5R
C9 C10: "ЧИП конденсатор", Manufacturer=Yageo, Tolerance=0,1, Voltage=25В, ID="0805 10 мкФ 25В X7R", ManufacturerPartNumber=CC0805KKX5R8BB106, Nominal=10мк, RuNominal="10 мкФ", TYPE=X7R
C11 C14 C15 C16 C17 C18 C19 C26 C28 C46 C48 C141 C144 C165: library part "Кер.ЧИП конд. 0402 0.1мкФ X7R 10%, 16В", "Кер. ЧИП-конденсатор", Power/Voltage=16В, Tolerance=±10%, PackageReference=0402, TKE=X7R
C21 C22: library part "Конденсатор гибридный SMD 33мкФ ±20% 50В", "Гибридный ЧИП-конденсатор", Manufacturer=Panasonic, ManufacturerPartNumber=EEHZC1H330XP, Power/Voltage=50В, Tolerance=±20%, LatestRevisionDate=29-May-2009, LatestRevisionNote="IPC-7351 Footprint Added.", PackageDescription="ZC Series - Anti-Vibration", PackageReference="ZC Series", Published=8-Jun-2000, Publisher="Altium Limited"
C23 C24 C29 C34 C38 C39: library part "Кер.ЧИП конд. 0805 1000пФ X7R 10% 100В", "Кер. ЧИП-конденсатор", Manufacturer=WALSIN, ManufacturerPartNumber=0805B102K100, Power/Voltage=100В, Tolerance=±10%, TKE=X7R
C27 C41 C45: library part "Кер.ЧИП конд. 1206 1000пФ X7К 10% 2000В", "Кер. ЧИП-конденсатор", Manufacturer=Johanson, ManufacturerPartNumber=202R18W102KV4E, Power/Voltage=2000В, Tolerance=±10%, TKE=X7R
C30 C35 C52 C53: library part "Кер.ЧИП конд. 1206 220пФ NP0 5% 2000В", "Кер. ЧИП-конденсатор", Manufacturer=Johanson, ManufacturerPartNumber=202R18W102KV4E, Power/Voltage=2000В, Tolerance=±10%, TKE=X7R
C31: library part "Кер.ЧИП конд. 1206 150пФ NP0 5% 2000В", "Кер. ЧИП-конденсатор", Manufacturer=Johanson, ManufacturerPartNumber=202R18W102KV4E, Power/Voltage=2000В, Tolerance=±10%, TKE=X7R
C36 C37 C40 C44: library part "Кер.ЧИП конд. 0805 0,01 мкФ X7R 10% 250В", "Кер. ЧИП-конденсатор", Manufacturer=Murate, ManufacturerPartNumber=GRM21BR72E103KW03, Power/Voltage=250В, Tolerance=±10%, TKE=X7R
C42 C51 C57 C58: library part "Кер.ЧИП конд. 1206 2,2мкФ X7R 10% 100В", "Кер. ЧИП-конденсатор", Manufacturer=Murata, ManufacturerPartNumber=GRM31CR72A225KA73L, Power/Voltage=100В, Tolerance=±10%, TKE=X7R
C43 C142: library part "Кер.ЧИП конд. 0603 0.1мкФ X7R 10% 50В", "Кер. ЧИП-конденсатор", Manufacturer=Murata, ManufacturerPartNumber=GRM188R71H104KA93D, Power/Voltage=50В, Tolerance=±10%, TKE=X7R
C47: library part "Кер.ЧИП конд. 0402 100пФ NPO 5%, 50В", "Кер. ЧИП-конденсатор", Power/Voltage=50В, Tolerance=±5%, PackageReference=0402, TKE=NPO
C49 C143 C145 C146 C147: library part "Кер.ЧИП конд. 0402 1000пФ NP0 5%, 50В", "Кер. ЧИП-конденсатор", Power/Voltage=50В, Tolerance=±5%, PackageReference=0402, TKE=NPO
C155: library part "Кер.ЧИП конд. 0805 47мкФ X5R 20% 10В", "Кер. ЧИП-конденсатор", Manufacturer=Murata, ManufacturerPartNumber=GRM21BR61A476ME15L, Power/Voltage=10В, Tolerance=±20%, TKE=X5R
D1: library part "Микросхема STM32F103RCT6", "Ultra-low-power 32-bit MCU ARM®-based Cortex®-M3, 128KB Flash, 16KB SRAM, 4KB EEPROM, LCD, USB, ADC, DAC", Manufacturer=STMicroelectronics, Code_JEDEC=MS-026, ComponentLink1Description="Manufacturer Link", ComponentLink3Description="Packaging Specification", Published=29-Jan-2009
DA1: library part "Микросхема LP5907MFX-3.3", "250-mA Ultra-Low-Noise, Low-IQ LDO", Manufacturer=TI, ComponentLink1Description=datasheet, ComponentLink1URL=http://www.ti.com/lit/ds/symlink/lp5907.pdf
DA2: library part "Микросхема TPS7A4700RGW", "36-V, 1-A, 4-µVRMS, RF LDO Voltage Regulator", Manufacturer=TI, ComponentLink1Description=datasheet, ComponentLink1URL=http://www.ti.com/lit/ds/symlink/tps7a47.pdf
DA3: library part "Микросхема INA280A3IDCKR", "2.7-V to 120-V, 1.1-MHz, High Precision Current Sense Amplifier in Small / (SC-70) Package", Manufacturer=TI, ComponentLink1Description=datasheet, ComponentLink1URL=https://datasheets.maximintegrated.com/en/ds/MAX4230-MAX4234.pdf
DA4 DA5 DA6 DA7: library part "Микросхема MAX4231AXT-T", "High-Output-Drive, 10MHz, 10V/μs,  Rail-to-Rail I/O Op Amps with Shutdown in SC70", Manufacturer=MAXIM, ComponentLink1Description=datasheet, ComponentLink1URL=https://datasheets.maximintegrated.com/en/ds/MAX4230-MAX4234.pdf
DD1: library part "Микросхема MAX13433EETD+", "RS-422 Transceivers with Low-Voltage Logic Interface 16M", Manufacturer=Maxim, ComponentLink1Description=datasheet, ComponentLink1URL=https://datasheets.maximintegrated.com/en/ds/MAX13430E-MAX13433E.pdf
DD2: library part "Микросхема MAX6650EUB", "Fan-Speed Regulators and Monitors with SMBus/I2C-Compatible Interface", Manufacturer=Maxim, ComponentLink1Description=datasheet, ComponentLink1URL=https://www.analog.com/media/en/technical-documentation/data-sheets/MAX6650-MAX6651.pdf
F1: library part "Терморезистор NTCALUG01", "ЧИП-резистор"
L1 L2 L8 L34 L35: library part "ЧИП индуктивность CSAB0420-2R2M", "Molding Power Choke", Manufacturer=Vishay, ManufacturerPartNumber=IHLP1616ABER1R0M11
L3 L4 L7 L9 L10 L32 L33 L36: library part "ЧИП дроссель 0603 BLM18PG121SN1D", "SMD EMI Suppression Filter EMIFIL", Manufacturer=Murata, ManufacturerPartNumber=BLM18PG121SN1D
L5 L6: library part "ЧИП индуктивность CDCSAB0530-R22M", "0.22мкГн, 19А, 5.2х5.0х3мм, Катушка индуктивности SMD", Manufacturer=Vishay, ManufacturerPartNumber=CDCSAB0530-R22M
R4 R8 R10 R14 R18 R24 R32: library part "Чип резистор 0402 100 Ом, 5%", "ЧИП-резистор", Tolerance=±5%, PackageReference=0402, TKE="100 ppm/°С"
R5 R11 R13 R25 R28 R29 R30 R31 R33 R34 R35 R36: library part "Чип резистор 0402 10 кОм, 5%", "ЧИП-резистор", Tolerance=±5%, PackageReference=0402, TKE="100 ppm/°С"
R6 R7: library part "Чип резистор 0402 4,7 кОм, 5%", "ЧИП-резистор", Tolerance=±5%, PackageReference=0402, TKE="100 ppm/°С"
R9 R12: library part "Чип резистор 0402 180 кОм, 5%", "ЧИП-резистор", Tolerance=±5%, PackageReference=0402, TKE="100 ppm/°С"
R15: library part "Чип резистор 2512 0.003Ом, 5%", "ЧИП-резистор PA2512FKF070R003E", Tolerance=±5%
R16 R17: library part "Чип резистор 0402 10 Ом, 5%", "ЧИП-резистор", Tolerance=±5%, PackageReference=0402, TKE="100 ppm/°С"
R19 R22 R23 R26: library part "Чип резистор 1206 33 Ом, 5%", "ЧИП-резистор", Manufacturer=ROHM, Tolerance=±5%, PackageReference=1206, TKE="300 ppm/°С"
R20 R21: library part "Чип резистор 0805 18 Ом, 5%", "ЧИП-резистор", Tolerance=±5%, PackageReference=0805, TKE="100 ppm/°С"
R27: library part "Чип резистор 0402 91 кОм, 5%", "ЧИП-резистор", Tolerance=±5%, PackageReference=0402, TKE="100 ppm/°С"
T1: library part "Трансформатор PA_OUT"
T2: library part "Трансформатор PA_OUT_VOLT"
T3: library part Transformer_KV_PA, "Трансформатор на бинокле BN-43-302 (2843000302)mu850 / Первичная обмотка - 2 витка проводом МГТФ 0,12 / Вторичная обмотка - 2 витка проводом МГТФ 0,12", Manufacturer=НЕЛС, Manufacturer Part Number="Трансформатор PUM_IN АНЕЛ.671143.002", Package="BN-43-302 (2843000302) 13.3x10.3 mm", SubType="Трансформатор бинокле", TYPE=Трансформатор
VD1 VD2 VD3 VD4 VD5 VD6 VD7: library part "ЧИП диод BAS16", "High-speed switching diodes", Manufacturer=Nexperia, Power/Voltage=100В, ComponentLink1Description=datasheet, ComponentLink1URL=https://assets.nexperia.com/documents/data-sheet/BAS16_SER.pdf, ManufacturerPartNumber=BAS16
VT1 VT2 VT3 VT5 VT6 VT7 VT8: library part "ЧИП транзистор PDTC114ET", "NPN resistor-equipped transistors;  R1 = 10 k, R2 = 10", ComponentLink1Description=datasheet, ComponentLink1URL=https://assets.nexperia.com/documents/data-sheet/PDTC114E_SER.pdf
VT4: library part "Транзистор MRFE6VP6600N", "RF Power LDMOS Transistors", ComponentLink1Description=datasheet, ComponentLink1URL=https://www.nxp.com/docs/en/data-sheet/MRFE6VP6600N.pdf
VT10: library part "ЧИП транзистор SiSS10DN", "N-Channel 40 V (D-S) MOSFET", ComponentLink1Description=datasheet, ComponentLink1URL=https://www.vishay.com/docs/65439/siss10dn.pdf
XP1: library part "Соединитель XT60-F", "AMASS XT60-F"
XP2: library part "Соединитель PLS-6", "Вилка штыревая 2.54мм 1x6 прямая тип1", LatestRevisionDate=17-Jul-2002, LatestRevisionNote="Re-released for DXP Platform.", Publisher="Altium Limited"
XP4: library part "Соединитель FH12-10S-0.5SVA", "0.5mm  Pitch FPC/FFC Connector FH12 Series", Manufacturer=Hirose
XP5: library part "Соединитель XT30UPB-M", "AMASS XT30UPB-M  5 mm"
XP6: library part "Соединитель 22232031", "Molex 2,54 мм pitch-3", Manufacturer=Connfly
XP7: library part "Соединитель IDC2-14MS", "JTAG Xilinx IDC2-14MS", Manufacturer=Molex
XW1 XW2: library part "Соединитель коаксиальный SMA-JR", "SMA-JR Разъем SMA гнездо на плату, прямой угол", ComponentLink1Description=datasheet, ComponentLink1URL=http://www.brownbear.ru/goods/2243.html
Z1: library part "Фильтр EMI EClamp2394P", "ESD/EMI Protection  for Color LCD Interfaces", Manufacturer=SEMTECH, PackageReference=SLP2116P8

## Free pads (board coordinates)
  round 5 hole 3.2: 1(4,4) 1(4,75) 1(37,17) 1(37,40.5) 1(45.25,46) 1(53.5,17) 1(53.5,40.5) 1(62,10) 1(62,46) 1(175,4) 1(175,75)

## Via types
v1: diameter 0.8, hole 0.4, Top Layer to Bottom Layer, tented both sides, 804 vias
v2: diameter 0.8, hole 0.4, Top Layer to Bottom Layer, 11 vias
v3: diameter 4, hole 2.5, Top Layer to Bottom Layer, 2 vias

## Nets (pads, with @x,y where several pads share a name; then routed paths per layer and width w, separated by ;. In a path a pad name is that pad's centre, name@x,y a point inside that pad or via, vN(x,y) a via of type N, cw(c..) or ccw(c..) an arc to the next point about the centre after c; other vN are vias at no path point)
ADC_CURRENT: C26.2 D1.16 R18.1 | length 3.5
  Top Layer w0.3: D1.16@34.035,60.378 34.035,59.044 C26.2@34.651,58.428 34.656,58.423 34.656,57.163 R18.1@34.661,57.158
ADC_TEMP: D1.14 DA5.3 DA5.4 | length 78.5
  Top Layer w0.2: v1(13.716,44.831) 13.688,44.803 13.688,44.269 13.397,43.978 13.397,41.21 12.194,40.007 12.194,11.814 15.73,8.278 DA5.4@20.243,8.278 DA5.3@22.293,8.278 ; v1(17.145,55.118) 17.145,55.219 17.998,56.072 19.874,56.072 20.574,55.372 30.226,55.372 v1(30.48,55.626) ; D1.14@33.035,60.378 33.035,57.135 v1(33.274,56.896)
  Bottom Layer w0.2: v1(13.716,44.831) 14.301,45.416 14.301,47.956 14.808,48.463 14.808,52.273 17.145,54.61 v1(17.145,55.118) ; v1(30.48,55.626) 32.766,55.626 33.274,56.134 v1(33.274,56.896)
ADC_VOLT: D1.15 DA4.3 DA4.4 | length 89.9
  Top Layer w0.2: D1.15@33.535,60.378 33.535,58.032 v1(33.782,57.785) ; v1(33.782,51.562) 34.382,52.162 40.363,52.162 40.493,52.032 41.604,50.921 63.108,50.921 69.658,57.472 69.658,59.117 72.898,62.357 74.295,62.357 74.656,61.996 91.841,61.996 93.599,63.754 93.599,68.199 97.281,71.881 DA4.4@99.231,71.881
  Top Layer w0.3: DA4.4@99.231,71.881 DA4.3@99.231,73.931
  Bottom Layer w0.2: v1(33.782,51.562) 33.782,54.359 33.974,54.551 33.974,57.431 33.782,57.623 v1(33.782,57.785)
BAND0_EN: D1.27 VT8.1 | length 9
  Top Layer w0.15: D1.27@35.955,67.298 42.751,67.298 43.686,66.363 VT8.1@44.602,66.363
BAND1_EN: D1.26 VT7.1 | length 10.8
  Top Layer w0.15: D1.26@35.955,66.798 38.386,66.798 43.647,61.537 VT7.1@44.602,61.537
BAND2_EN: D1.25 VT6.1 | length 15.2
  Top Layer w0.15: D1.25@35.955,66.302 38.387,66.302 42.223,62.466 42.223,58.301 43.813,56.711 VT6.1@44.695,56.711
BAND3_EN: D1.24 VT5.1 | length 28.5
  Top Layer w0.15: D1.24@35.955,65.798 38.396,65.798 41.842,62.352 41.842,57.534 42.223,57.153 v1(42.223,57.031) ; v1(51.875,61.41) VT5.1@53.111,61.41
  Bottom Layer w0.15: v1(42.223,57.031) 43.152,56.102 50.438,56.102 51.875,57.539 v1(51.875,61.41)
BAND4_EN: D1.28 VT3.1 | length 17.7
  Top Layer w0.15: D1.28@35.955,67.798 48.474,67.798 49.975,66.297 VT3.1@53.018,66.297
BAND5_EN: D1.29 VT1.1 | length 26.3
  Top Layer w0.15: D1.29@35.955,68.298 58.322,68.298 60.257,66.363 VT1.1@61.493,66.363
BAND6_EN: D1.23 VT2.1 | length 35.3
  Top Layer w0.15: D1.23@35.955,65.298 38.401,65.298 41.334,62.365 41.334,56.65 v1(41.969,56.015) ; v1(60.257,61.41) VT2.1@61.493,61.41
  Bottom Layer w0.15: v1(41.969,56.015) 42.35,55.634 54.481,55.634 v1(60.257,61.41)
CON_RS422A: XP4.9 Z1.4 | length 3.4
  Top Layer w0.2: Z1.4@13.787,66.051 13.793,66.057 13.793,69.471 XP4.9@13.799,69.477
CON_RS422B: XP4.8 Z1.3 | length 3.4
  Top Layer w0.2: Z1.3@14.287,66.051 14.293,66.057 14.293,69.471 XP4.8@14.299,69.477
CON_RS422Y: XP4.6 Z1.1 | length 3.4
  Top Layer w0.2: Z1.1@15.287,66.051 15.293,66.057 15.293,69.471 XP4.6@15.299,69.477
CON_RS422Z: XP4.7 Z1.2 | length 3.4
  Top Layer w0.2: Z1.2@14.787,66.051 14.793,66.057 14.793,69.471 XP4.7@14.799,69.477
CON_TX_FAIL: R4.1 R5.1 XP4.3 | length 5.3
  Top Layer w0.25: XP4.3@16.799,69.477 16.799,67.596 17.527,66.868 R5.1@18.728,66.868 18.757,66.839 19.9,66.839 R4.1@19.929,66.81
CON_TXON: R10.1 R11.1 XP4.4 | length 5.5
  Top Layer w0.25: XP4.4@16.299,69.477 16.299,67.334 16.823,66.81 R11.1@16.823,65.413 16.887,65.476 17.892,65.476 R10.1@17.955,65.54
DAC_BIAS1: D1.20 R24.1 | length 39
  Top Layer w0.2: R24.1@16.246,48.522 16.246,49.266 16.637,49.657 v1(17.399,49.657) ; v1(19.304,55.372) 19.812,54.864 36.179,54.864 39.652,58.336 39.652,62.526 38.379,63.798 D1.20@35.955,63.798
  Bottom Layer w0.2: v1(17.399,49.657) 17.399,53.467 v1(19.304,55.372)
DAC_BIAS2: D1.21 R32.1 | length 78.7
  Top Layer w0.2: v1(14.097,43.688) 14.097,41.148 12.594,39.645 12.594,16.904 15.139,14.359 R32.1@16.5,14.359 ; v1(18.161,55.245) 18.985,54.421 36.302,54.421 40.052,58.171 40.052,62.691 38.445,64.298 D1.21@35.955,64.298
  Bottom Layer w0.2: v1(14.097,43.688) 14.732,44.323 14.732,47.688 15.208,48.164 15.208,51.911 18.161,54.864 v1(18.161,55.245)